# Altium PCB PCB_ATU_V1_IO_Module copy_2023-03-02.pcbdoc (part 2 of 2)
Units mm, origin at the board's own origin, x right, y up, seen from the top; angles counter-clockwise.
Board outline 157.45 x 177.29 mm, 2 copper layers (Top Layer, Bottom Layer); 216 components, 163 nets, 870 pads, 1 vias.
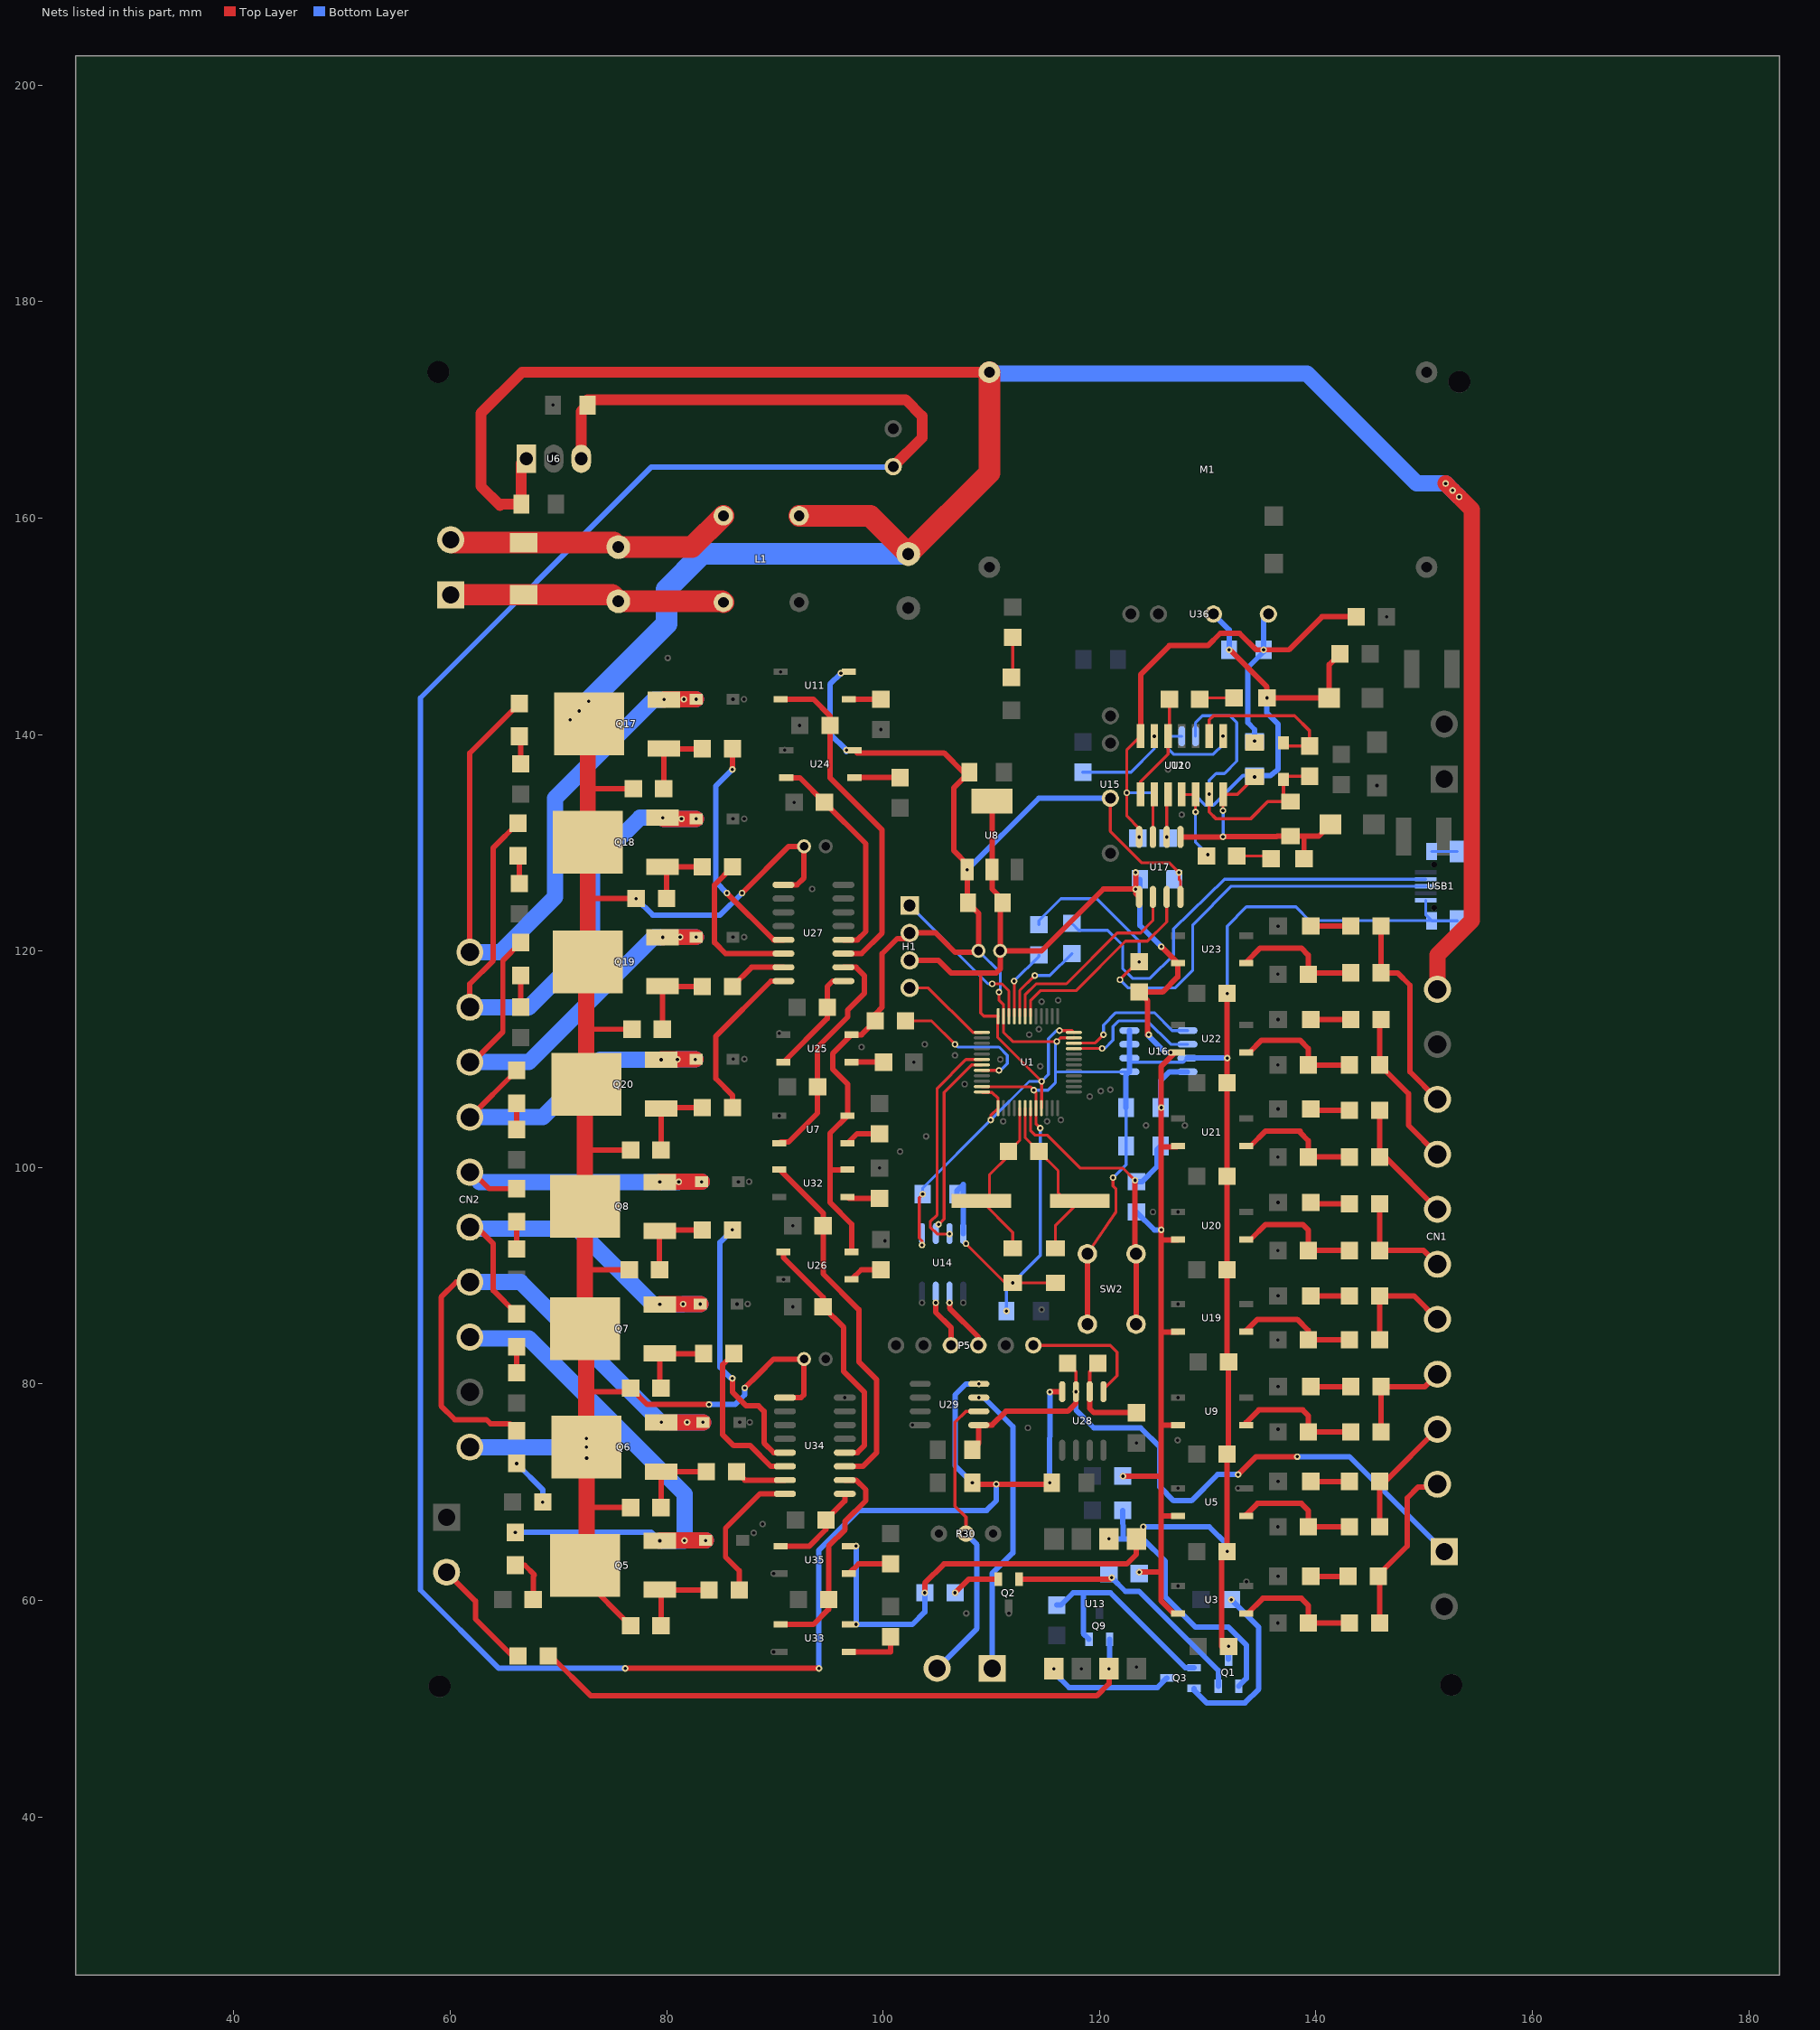
[diagram p2: the nets of this part, all layers, seen from the top]

## Via types
v1: diameter 0.61, hole 0.305, Top Layer to Bottom Layer, tented both sides, 1 vias

## Nets (pads, with @x,y where several pads share a name; then routed paths per layer and width w, separated by ;. In a path a pad name is that pad's centre, name@x,y a point inside that pad or via, vN(x,y) a via of type N, cw(c..) or ccw(c..) an arc to the next point about the centre after c; other vN are vias at no path point) (continued)
GND1: C1.2 C5.1 C6.1 C7.1 C12.2 C16.1 C17.2 C18.1 C22.2 C27.2 H1.2 pad.2@96.105,145.669 pad.2@96.613,138.557 pad.2@97.502,57.785 pad.2@97.502,65.024 pad.2@103.85,60.706 pad.2@107.662,92.964 pad.2@107.775,127.508 pad.2@110.71,116.205 pad.2@111.98,89.339 pad.2@111.404,86.741 pad.2@113.925,107.148 pad.2@114.52,103.632 pad.2@116.044,111.633 pad.2@121.251,99.06 pad.2@124.045,66.802 pad.2@127.347,127.254 pad.2@131.795,64.516 pad.2@131.795,110.109 pad.2@131.795,116.078 pad.2@131.922,55.753 Q1.3 R3.2 R13.1 R15.1 R27.1 R28.1 R29.1 R33.1 R34.1 R35.1 R36.1 SW2.1 SW2.2 U1.8 U1.23 U1.35 U1.47 U7.2 U8.1 U11.2 U13.5 U14.4 U15.4 U16.1 U16.2 U16.3 U16.4 U16.7 U17.4 U24.2 U25.2 U26.2 U32.2 U33.2 U35.2 USB1.5 USB1.8 USB1.9 | length 362.4
  Top Layer w0.27: pad.2@107.662,92.964 111.287,89.339 C5.1@111.98,89.339 C6.1@115.917,89.339 ; U1.47@109.128,107.478 109.163,107.442 113.631,107.442 pad.2@113.925,107.148 114.126,106.947 U1.8@114.127,105.478 ; pad.2@110.71,116.205 110.71,115.443 111.127,115.026 U1.35@111.127,113.978 ; U1.35@111.127,113.978 111.127,112.486 111.98,111.633 pad.2@116.044,111.633 116.389,111.978 U1.23@117.627,111.978 ; U1.8@114.127,105.478 114.139,105.466 114.139,104.013 pad.2@114.52,103.632 ; U1.23@117.627,111.978 U1.23@117.627,112.014 ; SW2.1@118.874,92.024 121.505,95.885 121.505,98.044 121.251,98.298 pad.2@121.251,99.06 ; U15.4@120.997,134.112 121.251,134.112 120.997,133.858 120.997,131.064 123.918,128.143 126.458,128.143 pad.2@127.347,127.254 127.347,126.619 127.474,126.492 U17.4@127.474,124.989
  Top Layer w0.5: 95.089,99.782 96.675,99.782 U32.2@96.715,99.822 U32.2@96.232,99.822 ; U26.2@97.096,92.202 97.096,94.767 95.089,96.774 95.089,98.196 95.089,100.965 95.089,103.149 U7.2@96.715,104.775 96.715,107.721 95.343,109.093 95.343,110.515 U25.2@97.096,112.268 98.008,112.268 R3.2@99.278,113.538 99.278,114.17 99.915,114.808 99.915,119.761 101.312,121.158 101.947,121.158 H1.2@102.455,121.666 104.868,121.666 106.646,119.888 108.694,119.888 C1.2@108.821,120.015 108.821,123.486 C16.1@107.848,124.46 107.775,124.532 U8.1@107.775,127.508 107.775,128.03 106.519,129.286 106.519,135.07 C18.1@107.975,136.525 107.408,136.525 105.63,138.303 97.604,138.303 U24.2@97.35,138.557 ; pad.2@103.85,60.706 103.85,61.592 105.63,63.373 115.79,63.373 122.521,63.373 123.41,64.262 U13.5@123.41,65.69 ; SW2.2@118.874,85.522 SW2.1@118.874,92.024 ; R33.1@131.795,116.078 pad.2@131.795,110.109 R34.1@131.795,107.823 R35.1@131.795,99.187 R36.1@131.795,90.551 131.795,82.169 R29.1@131.922,82.042 131.922,73.66 R28.1@131.795,73.533 R27.1@131.795,64.516 131.284,64.516 131.284,55.753 R15.1@131.922,55.753
  Bottom Layer w0.27: C1.2@108.821,120.015 110.837,117.999 110.837,116.332 pad.2@110.71,116.205 ; pad.2@113.925,107.148 115.242,107.148 115.917,107.823 115.917,111.506 pad.2@116.044,111.633 ; 115.917,108.854 U16.1@122.76,108.839 ; pad.2@121.251,99.06 122.453,100.261 C7.1@122.453,101.981 C12.2@122.453,105.537 ; 122.76,109.731 127.743,109.731 U16.7@128.125,110.109 ; pad.2@131.795,116.078 131.795,122.304 133.57,124.079 138.142,124.079 139.412,122.809 USB1.9@150.702,122.784 ; USB1.5@150.152,124.684 150.152,123.335 USB1.9@150.702,122.784 ; USB1.8@153.056,122.784 USB1.9@150.702,122.784
  Bottom Layer w0.3: C27.2@111.404,86.741 111.404,88.763 pad.2@111.98,89.339 114.52,91.879 pad.2@114.52,103.632
  Bottom Layer w0.5: pad.2@96.105,145.669 95.089,144.653 95.089,140.081 pad.2@96.613,138.557 pad.2@96.613,138.43 ; pad.2@97.502,65.024 pad.2@97.502,57.785 102.709,57.785 103.85,58.925 R13.1@103.85,60.706 ; C22.2@106.842,97.536 106.842,97.859 107.408,98.425 U14.4@107.408,93.891 ; pad.2@107.775,127.508 114.379,134.112 U15.4@120.997,134.112 ; C12.2@122.453,105.537 122.453,108.532 U16.1@122.76,108.839 U16.2@122.76,110.109 U16.3@122.76,111.379 U16.4@122.76,112.649 ; pad.2@124.045,66.802 130.141,66.802 131.795,65.148 pad.2@131.795,64.516 ; U16.7@128.125,110.109 pad.2@131.795,110.109 ; Q1.3@131.919,54.59 131.922,54.592 pad.2@131.922,55.753
GNDRS485: C13.1 C14.1 C15.1 C19.1 D10.2 D11.2 LED2.2 LED3.2 pad.2@131.411,130.556 pad.2@131.411,132.969 pad.2@131.978,147.828 pad.2@134.332,136.075 pad.2@135.468,143.383 R22.2 U10.7 U12.5 U17.5 U36.4 | length 60.5
  Top Layer w0.27: pad.2@131.411,132.969 U10.7@131.411,134.46
  Top Layer w0.3: U10.7@131.411,134.46 132.717,134.46 C15.1@134.332,136.075
  Top Layer w0.5: U17.5@127.474,130.535 131.39,130.534 pad.2@131.411,130.556 136.364,130.556 136.423,130.614 C14.1@137.634,130.614 140.265,130.614 D10.2@141.349,131.699 ; pad.2@131.978,147.828 132.046,147.828 135.468,144.391 LED2.2@135.469,143.383 ; LED2.2@135.469,143.383 D11.2@141.222,143.383 141.222,146.466 R22.2@142.204,147.447 ; LED3.2@138.898,128.524 138.898,130.614
  Bottom Layer w0.3: U12.5@128.871,134.478 128.871,134.366 129.76,133.477 130.522,133.477 133.248,136.202 C13.1@134.332,136.202 ; pad.2@131.411,130.556 pad.2@131.411,132.969
  Bottom Layer w0.5: U36.4@130.522,151.13 131.978,149.675 C19.1@131.978,147.828 ; C13.1@134.332,136.202 135.798,136.202 136.491,136.779 136.491,140.97 135.468,141.994 pad.2@135.468,143.383
INPUT1: CN1.1 R2.2 R58.2 | length 16
  Top Layer w0.5: R2.2@145.892,57.912 145.892,62.103 R58.2@145.765,62.23 145.765,62.36 148.429,65.024 148.429,69.469 149.445,70.485 150.969,70.485 CN1.1@151.223,70.739
INPUT2: CN1.2 R6.2 R59.2 | length 11.5
  Top Layer w0.5: R6.2@145.892,66.802 R59.2@145.892,70.993 146.397,70.993 CN1.2@151.223,75.819
INPUT3: CN1.3 R10.2 R60.2 | length 9.9
  Top Layer w0.5: R10.2@146.019,75.565 R60.2@146.019,79.756 150.08,79.756 CN1.3@151.223,80.899
INPUT4: CN1.4 R12.2 R61.2 | length 10.3
  Top Layer w0.5: R12.2@145.892,84.074 R61.2@145.892,88.138 149.064,88.138 CN1.4@151.223,85.979
INPUT5: CN1.5 R44.2 R62.2 | length 10.2
  Top Layer w0.5: R62.2@145.892,96.647 R44.2@145.892,92.329 149.953,92.329 CN1.5@151.223,91.059
INPUT6: CN1.6 R41.2 R63.2 | length 11.6
  Top Layer w0.5: R63.2@145.892,105.283 R41.2@145.892,100.965 146.397,100.965 CN1.6@151.223,96.139
INPUT7: CN1.7 R39.2 R64.2 | length 14.7
  Top Layer w0.5: R64.2@146.019,113.665 145.892,113.538 R39.2@145.892,109.474 148.556,106.807 148.556,103.886 CN1.7@151.223,101.219
INPUT8: CN1.8 R37.2 R65.2 | length 19
  Top Layer w0.5: R65.2@146.019,122.301 R37.2@146.019,117.983 147.54,117.983 148.683,116.84 148.683,108.839 CN1.8@151.223,106.299
LED1_1: LED1.1 R1.1 | length 3.7
  Top Layer w0.3: LED1.1@111.853,145.281 111.98,145.408 R1.1@111.98,148.968
LED2_1: LED2.1 R16.1 | length 3.2
  Top Layer w0.27: R16.1@129.255,143.256 129.382,143.383 LED2.1@132.434,143.383
LED3_1: LED3.1 R19.1 | length 3.3
  Top Layer w0.27: R19.1@132.684,128.778 135.609,128.778 LED3.1@135.863,128.524
LED_IN1_1: LED_IN1.1 R58.1 | length 3.4
  Top Layer w0.5: LED_IN1.1@139.533,62.23 R58.1@142.966,62.23
LED_OUT1_2: LED_OUT1.2 R84.1 | length 2.4
  Top Layer w0.5: R84.1@66.133,103.508 LED_OUT1.2@66.133,105.925
LED_OUT2_2: LED_OUT2.2 R85.1 | length 2.9
  Top Layer w0.5: R85.1@66.514,114.811 LED_OUT2.2@66.514,117.736
LED_OUT3_2: LED_OUT3.2 R86.1 | length 2.6
  Top Layer w0.5: LED_OUT3.2@66.26,128.785 66.387,128.658 R86.1@66.387,126.241
LED_OUT4_2: LED_OUT4.2 R87.1 | length 2.6
  Top Layer w0.5: LED_OUT4.2@66.387,139.834 66.514,139.707 R87.1@66.514,137.29
LED_OUT5_2: LED_OUT5.2 R91.1 | length 4.5
  Top Layer w0.5: LED_OUT5.2@66.006,63.253 66.889,63.253 67.784,62.357 67.66,62.233 R91.1@67.66,60.071
LED_OUT6_2: LED_OUT6.2 pad.2@66.133,72.651 pad.2@68.549,69.088 R90.1 | length 4.6
  Bottom Layer w0.5: pad.2@66.133,72.651 68.549,70.235 pad.2@68.549,69.088
LED_OUT7_2: LED_OUT7.2 R89.1 | length 2.4
  Top Layer w0.5: R89.1@66.133,81.029 LED_OUT7.2@66.133,83.446
LED_OUT8_2: LED_OUT8.2 R88.1 | length 2.5
  Top Layer w0.5: R88.1@66.133,92.459 LED_OUT8.2@66.133,95.003
NRST: C7.2 pad.2@123.283,98.809 R7.1 SW2.3 SW2.4 U1.7 | length 31.5
  Top Layer w0.27: U1.7@113.627,105.478 113.631,103.378 114.012,102.997 115.155,102.997 118.203,99.949 122.14,99.949 pad.2@123.283,98.809
  Top Layer w0.5: pad.2@123.283,98.809 123.283,92.116 SW2.4@123.375,92.024 SW2.3@123.375,85.522
  Bottom Layer w0.5: R7.1@123.41,98.682 123.921,98.682 125.315,100.076 125.315,101.658 C7.2@125.638,101.981
NULL: 
OUTPUT1T: CN2.4 D20.1 LED_OUT1.1 pad.2@79.496,109.957 pad.2@80.992,109.982 pad.2@82.643,109.982 Q20.3 | length 32.6
  Top Layer w0.5: CN2.4@61.815,104.648 LED_OUT1.1@66.133,108.959
  Top Layer w1.5: Q20.3@79.496,109.956 79.522,109.982 pad.2@80.992,109.982 pad.2@82.643,109.982
  Bottom Layer w1.5: CN2.4@61.815,104.648 68.546,104.648 73.855,109.957 pad.2@79.496,109.957 ; pad.2@79.496,109.957 80.966,109.956 pad.2@80.992,109.982 ; 81.334,109.982 pad.2@80.992,109.982 ; pad.2@82.643,109.982 pad.2@80.992,109.982
OUTPUT2T: CN2.3 D19.1 LED_OUT2.1 pad.2@79.623,121.26 pad.2@81.246,121.285 pad.2@82.721,121.285 Q19.3 | length 41.9
  Top Layer w0.5: CN2.3@61.815,109.728 62.069,109.728 64.863,112.522 64.863,119.118 LED_OUT2.1@66.514,120.77
  Top Layer w1.5: Q19.3@79.623,121.259 79.649,121.285 pad.2@81.246,121.285 D19.1@82.721,121.285
  Bottom Layer w1.5: CN2.3@61.815,109.728 67.276,109.728 78.808,121.26 pad.2@79.623,121.26 ; pad.2@79.623,121.26 79.649,121.285 pad.2@81.246,121.285 pad.2@82.721,121.285
OUTPUT3T: CN2.2 D18.1 LED_OUT3.1 pad.2@79.623,132.309 pad.2@81.373,132.207 pad.2@82.721,132.207 Q18.3 | length 54.4
  Top Layer w0.5: CN2.2@61.815,114.808 61.815,116.967 63.974,119.126 63.974,129.533 LED_OUT3.1@66.26,131.819
  Top Layer w1.5: Q18.3@79.623,132.308 79.724,132.207 pad.2@81.373,132.207 D18.1@82.721,132.207
  Bottom Layer w1.5: CN2.2@61.815,114.808 67.276,114.808 73.118,120.65 73.118,127.889 77.538,132.309 pad.2@79.623,132.309 ; pad.2@79.623,132.309 79.724,132.207 pad.2@81.373,132.207 pad.2@82.721,132.207
OUTPUT4T: CN2.1 D17.1 LED_OUT4.1 pad.2@79.75,143.231 pad.2@81.586,143.256 pad.2@82.721,143.256 Q17.3 | length 63.8
  Top Layer w0.5: CN2.1@61.815,119.888 61.815,138.296 LED_OUT4.1@66.387,142.868
  Top Layer w1.5: Q17.3@79.75,143.23 79.776,143.256 pad.2@81.586,143.256 D17.1@82.721,143.256
  Bottom Layer w1.5: CN2.1@61.815,119.888 64.609,119.888 69.689,124.968 69.689,134.112 78.808,143.231 pad.2@79.75,143.231 ; pad.2@79.776,143.256 81.587,143.256 pad.2@82.721,143.256
OUTPUT5T: CN2.8 D1.1 LED_OUT5.1 pad.2@66.006,66.287 pad.2@79.369,65.506 pad.2@81.647,65.532 pad.2@83.61,65.532 Q5.3 | length 52.3
  Top Layer w1.5: Q5.3@79.369,65.506 79.395,65.532 pad.2@81.647,65.532 D1.1@83.61,65.532
  Bottom Layer w0.5: pad.2@66.006,66.287 78.588,66.287 pad.2@79.369,65.506
  Bottom Layer w1.5: CN2.8@61.815,84.328 61.942,84.201 67.276,84.201 81.647,69.83 pad.2@81.647,65.532 ; pad.2@79.369,65.506 81.621,65.506 pad.2@81.647,65.532 ; pad.2@83.61,65.532 pad.2@81.647,65.532
OUTPUT6T: CN2.7 D2.1 LED_OUT6.1 pad.2@79.522,76.454 pad.2@81.887,76.454 pad.2@83.356,76.454 Q6.3 | length 52
  Top Layer w0.5: CN2.7@61.815,89.408 60.545,89.408 59.148,88.011 59.148,77.978 60.418,76.708 63.339,76.708 63.72,76.327 65.492,76.327 LED_OUT6.1@66.133,75.685
  Top Layer w1.5: Q6.3@79.496,76.428 pad.2@79.522,76.454 pad.2@81.887,76.454 D2.1@83.356,76.454
  Bottom Layer w1.5: CN2.7@61.815,89.408 66.517,89.408 pad.2@79.496,76.429 ; pad.2@79.496,76.428 81.861,76.428 pad.2@81.887,76.454 pad.2@83.356,76.454
OUTPUT7T: CN2.6 D3.1 LED_OUT7.1 pad.2@79.369,87.35 pad.2@81.52,87.376 pad.2@83.102,87.376 Q7.3 | length 38.2
  Top Layer w0.5: CN2.6@61.815,94.488 62.45,94.488 63.974,92.964 63.974,88.639 LED_OUT7.1@66.133,86.48
  Top Layer w1.5: Q7.3@79.369,87.35 79.395,87.376 pad.2@81.52,87.376 D3.1@83.102,87.376
  Bottom Layer w1.5: CN2.6@61.815,94.488 61.942,94.361 71.721,94.361 78.732,87.35 pad.2@79.369,87.35 81.494,87.35 pad.2@81.52,87.376 pad.2@83.102,87.376
OUTPUT8T: CN2.5 D4.1 LED_OUT8.1 pad.2@79.369,98.653 pad.2@81.119,98.679 pad.2@83.229,98.679 Q8.3 | length 32.7
  Top Layer w0.5: CN2.5@61.815,99.568 62.069,99.568 63.593,98.044 LED_OUT8.1@66.133,98.037 ; Q8.3@79.369,98.653 81.093,98.653 pad.2@81.119,98.679
  Top Layer w1.5: Q8.3@79.369,98.653 79.369,98.679 pad.2@81.119,98.679 D4.1@83.229,98.679
  Bottom Layer w1.5: CN2.5@61.815,99.568 62.73,98.653 pad.2@79.369,98.653 81.093,98.653 pad.2@81.119,98.679 ; 81.469,98.679 pad.2@81.119,98.679 ; pad.2@83.229,98.679 pad.2@81.119,98.679
P5_1: P5.1 U28.5 | length 12.2
  Top Layer w0.3: P5.1@113.885,83.566 120.997,83.566 121.632,82.931 121.632,80.772 120.362,79.502 U28.5@120.362,79.286
P5_3: P5.3 pad.2@106.138,87.503 U14.6 | length 5
  Top Layer w0.5: pad.2@106.138,87.503 106.138,86.995 108.805,84.328 P5.3@108.805,83.566
P5_4: P5.4 pad.2@104.868,87.503 U14.7 | length 4.5
  Top Layer w0.5: pad.2@104.868,87.503 104.868,86.614 106.265,85.217 P5.4@106.265,83.566
Q5_1: Q5.1 R57.1 R80.1 | length 7.9
  Top Layer w0.5: R57.1@79.471,57.658 79.471,60.885 Q5.1@79.369,60.986 79.395,60.96 R80.1@83.911,60.96
Q6_1: Q6.1 R77.1 R81.1 | length 7.5
  Top Layer w0.5: R77.1@79.471,68.58 79.471,71.883 Q6.1@79.496,71.908 79.522,71.882 R81.1@83.657,71.882
Q7_1: Q7.1 R78.1 R82.1 | length 7.3
  Top Layer w0.5: R78.1@79.471,79.629 79.369,79.731 Q7.1@79.369,82.83 79.395,82.804 R82.1@83.403,82.804
Q8_1: Q8.1 R79.1 R83.1 | length 7.5
  Top Layer w0.5: R79.1@79.344,90.551 79.344,94.108 Q8.1@79.369,94.133 79.47,94.234 R83.1@83.276,94.234
R2_1: R2.1 R4.2 U3.1 | length 12
  Top Layer w0.5: U3.1@133.545,58.801 133.697,58.801 135.094,60.198 138.65,60.198 139.288,59.56 R4.2@139.288,57.912 R2.1@143.093,57.912
R3_1: pad.2@106.646,111.379 pad.2@110.71,108.966 R3.1 U1.44 | length 14.1
  Top Layer w0.27: R3.1@102.077,113.538 104.487,113.538 pad.2@106.646,111.379 ; U1.44@109.127,108.978 109.139,108.966 pad.2@110.71,108.966
  Bottom Layer w0.27: pad.2@106.646,111.379 106.9,111.125 110.71,111.125 111.472,110.363 111.472,109.601 110.837,108.966 pad.2@110.71,108.966
R5_2: R5.2 R6.1 U5.1 | length 11.9
  Top Layer w0.5: U5.1@133.545,67.818 133.545,67.92 134.586,68.961 138.65,68.961 139.288,68.323 R5.2@139.288,66.802 R6.1@143.093,66.802
R8_1: C6.2 R8.1 U1.6 X1.1 | length 16.7
  Top Layer w0.27: U1.6@113.127,105.478 113.127,102.741 R8.1@114.396,101.473 116.174,99.695 116.171,97.663 116.933,96.901 X1.1@118.184,96.901 ; C6.2@115.917,92.525 115.917,94.634 X1.1@118.184,96.901
R8_2: C5.2 R8.2 U1.5 X1.2 | length 16.1
  Top Layer w0.27: C5.2@111.98,92.525 111.98,93.999 X1.2@109.078,96.901 109.821,96.901 109.821,99.314 111.597,101.089 R8.2@111.597,101.473 112.627,102.503 U1.5@112.627,105.478
R9_2: R9.2 R10.1 U9.1 | length 12.1
  Top Layer w0.5: U9.1@133.545,76.2 133.545,76.429 134.713,77.597 138.777,77.597 139.288,77.086 R9.2@139.288,75.565 R10.1@143.22,75.565
R11_2: R11.2 R12.1 U19.1 | length 11.4
  Top Layer w0.5: U19.1@133.545,84.836 133.545,84.938 134.586,85.979 138.269,85.979 139.288,84.96 R11.2@139.288,84.074 R12.1@143.093,84.074
R13_2: pad.2@106.649,60.706 Q2.1 R13.2 | length 4.5
  Top Layer w0.5: pad.2@106.649,60.706 107.898,61.956 Q2.1@110.649,61.956
R14_1: pad.2@121.124,62.103 Q1.1 Q2.2 R14.1 | length 23.5
  Top Layer w0.5: Q2.2@112.549,61.956 120.977,61.956 pad.2@121.124,62.103
  Bottom Layer w0.5: pad.2@121.124,62.103 122.394,60.833 123.664,60.833 130.969,53.528 Q1.1@130.969,52.09
R16_2: R16.2 U10.1 U10.12 | length 9.9
  Top Layer w0.27: U10.1@123.791,134.46 123.791,135.636 126.331,138.176 U10.12@126.331,139.86 126.456,139.984 R16.2@126.456,143.256
R17_1: pad.2@125.061,139.842 R17.1 U10.13 U12.1 | length 8.7
  Bottom Layer w0.27: R17.1@118.457,136.522 122.905,136.522 125.061,138.679 U12.1@125.061,139.842
R18_1: C14.2 D9.1 pad.2@130.141,134.493 R18.1 U10.6 U12.4 | length 27.6
  Top Layer w0.27: U10.6@130.141,134.46 pad.2@130.141,134.493
  Top Layer w0.3: U10.6@130.141,134.46 130.141,132.842 130.776,132.207 133.951,132.207 135.544,133.8 C14.2@137.634,133.8 ; C14.2@136.999,134.493 D9.1@136.999,135.841 ; D9.1@136.999,135.841 137.3,136.141 R18.1@139.412,136.141
  Bottom Layer w0.27: U12.4@128.871,139.842 128.871,141.097 129.506,141.732 132.046,141.732 132.681,141.097 132.681,137.541 131.538,136.398 130.776,136.398 130.141,135.763 pad.2@130.141,134.493
R18_2: D9.2 R18.2 U10.9 | length 15.4
  Top Layer w0.3: U10.9@130.141,139.86 130.141,141.351 130.522,141.732 138.015,141.732 139.412,140.335 R18.2@139.412,138.941 137.3,138.941 D9.2@136.999,139.241
R19_2: pad.2@128.871,132.842 pad.2@130.012,128.905 R19.2 U10.4 U10.5 | length 7.3
  Top Layer w0.27: U10.4@127.601,134.46 U10.5@128.871,134.46 pad.2@128.871,132.842
  Bottom Layer w0.27: pad.2@128.871,132.842 128.871,130.046 pad.2@130.012,128.905
R37_1: R37.1 R38.2 U23.1 | length 12.4
  Top Layer w0.5: U23.1@133.545,118.872 133.545,118.974 134.84,120.269 138.65,120.269 139.288,119.631 R38.2@139.288,117.856 139.415,117.983 R37.1@143.22,117.983
R39_1: R39.1 R40.2 U22.1 | length 11.9
  Top Layer w0.5: U22.1@133.545,110.617 133.824,110.617 134.967,111.76 138.523,111.76 139.288,110.995 R40.2@139.288,109.474 R39.1@143.093,109.474
R41_1: R41.1 R42.2 U21.1 | length 12.1
  Top Layer w0.5: U21.1@133.545,101.981 133.951,101.981 135.348,103.378 138.523,103.378 138.523,103.251 139.288,102.486 R42.2@139.288,100.965 R41.1@143.093,100.965
R43_2: R43.2 R44.1 U20.1 | length 12.2
  Top Layer w0.5: U20.1@133.545,93.345 133.951,93.345 135.348,94.742 138.777,94.742 139.288,94.231 R43.2@139.288,92.329 R44.1@143.093,92.329
R49_1: R49.1 U26.1 | length 3.1
  Top Layer w0.5: U26.1@97.096,89.662 97.983,90.548 R49.1@99.788,90.548
R50_1: R50.1 U32.1 | length 3
  Top Layer w0.5: U32.1@96.715,97.282 96.845,97.152 R50.1@99.661,97.152
R51_1: R51.1 U33.1 | length 5.2
  Top Layer w0.5: U33.1@96.842,55.245 100.677,55.245 R51.1@100.677,56.639
R55_2: R55.2 U34.1 U35.3 | length 8.8
  Top Layer w0.5: U35.3@90.542,65.024 93.184,65.024 94.711,66.551 R55.2@94.711,67.437 96.461,69.188 U34.1@96.461,69.85
R56_1: R56.1 U35.1 | length 4.2
  Top Layer w0.5: U35.1@96.842,62.484 97.729,63.37 R56.1@100.677,63.37
R59_1: LED_IN2.1 R59.1 | length 3.6
  Top Layer w0.5: LED_IN2.1@139.533,70.993 R59.1@143.093,70.993
R60_1: LED_IN3.1 R60.1 | length 3.7
  Top Layer w0.5: LED_IN3.1@139.533,79.756 R60.1@143.22,79.756
R61_1: LED_IN4.1 R61.1 | length 3.6
  Top Layer w0.5: LED_IN4.1@139.533,88.138 R61.1@143.093,88.138
R62_1: LED_IN5.1 R62.1 | length 3.6
  Top Layer w0.5: LED_IN5.1@139.533,96.774 139.66,96.647 R62.1@143.093,96.647
R63_1: LED_IN6.1 R63.1 | length 3.6
  Top Layer w0.5: LED_IN6.1@139.533,105.41 139.66,105.283 R63.1@143.093,105.283
R64_1: LED_IN7.1 R64.1 | length 3.7
  Top Layer w0.5: LED_IN7.1@139.533,113.665 R64.1@143.22,113.665
R65_1: LED_IN8.1 R65.1 | length 3.7
  Top Layer w0.5: LED_IN8.1@139.533,122.301 R65.1@143.22,122.301
R73_1: Q3.2 Q9.1 R73.1 | length 20.5
  Bottom Layer w0.5: R73.1@116.044,59.566 116.428,59.566 117.568,60.706 120.997,60.706 127.921,53.782 Q3.2@128.724,53.782 ; 118.495,60.706 118.495,56.945 Q9.1@119.031,56.408
R74_2: pad.2@132.176,60.071 Q3.1 R74.2 | length 16.5
  Bottom Layer w0.5: Q3.1@128.724,51.882 128.724,51.709 129.887,50.546 133.443,50.546 134.713,51.816 134.713,57.534 R74.2@132.176,60.071
R94_1: Q17.1 R94.1 R98.1 | length 7.3
  Top Layer w0.5: R98.1@79.725,135.001 79.75,135.026 Q17.1@79.75,138.71 79.776,138.684 R94.1@83.276,138.684
R94_2: pad.2@85.564,125.349 pad.2@86.072,136.779 R94.2 U27.13 | length 21.4
  Top Layer w0.5: pad.2@85.564,125.349 89.882,121.031 U27.13@90.796,121.031 ; pad.2@86.072,136.779 R94.2@86.075,138.684
  Bottom Layer w0.5: pad.2@85.564,125.349 84.548,126.365 84.548,135.255 pad.2@86.072,136.779
R95_1: Q18.1 R95.1 R99.1 | length 6.8
  Top Layer w0.5: R99.1@79.979,124.841 79.979,127.433 Q18.1@79.623,127.788 79.649,127.762 R95.1@83.276,127.762
R95_2: R95.2 U27.14 | length 14.5
  Top Layer w0.5: R95.2@86.075,127.762 84.421,126.109 84.421,120.777 85.437,119.761 87.723,119.761 U27.14@90.796,119.761
R96_1: Q19.1 R96.1 R100.1 | length 7.6
  Top Layer w0.5: R100.1@79.598,112.776 79.623,112.801 Q19.1@79.623,116.739 79.649,116.713 R96.1@83.276,116.713
R96_2: R96.2 U27.15 | length 5.5
  Top Layer w0.5: R96.2@86.075,116.713 87.853,118.491 U27.15@90.796,118.491
R97_1: Q20.1 R97.1 R101.1 | length 7.7
  Top Layer w0.5: R101.1@79.471,101.6 79.496,101.625 Q20.1@79.496,105.436 79.597,105.537 R97.1@83.276,105.537
R97_2: R97.2 U27.16 | length 15.6
  Top Layer w0.5: R97.2@86.075,105.537 86.075,106.677 84.548,108.204 84.548,112.141 89.628,117.221 U27.16@90.796,117.221
RX: U1.31 U17.2 | length 18.8
  Top Layer w0.27: U1.31@113.128,113.977 113.123,115.951 114.139,116.967 115.917,116.967 116.933,116.967 121.632,121.666 123.791,121.666 124.934,122.809 U17.2@124.934,124.989
RX1: U10.2 U17.7 | length 4
  Top Layer w0.27: U17.7@124.934,130.535 124.934,134.333 U10.2@125.061,134.46
S$6: 
S$11: 
S$28: 
S$32: 
S$1126: 
S$113669: 
S$113685: 
S$113701: 
S$113717: 
S$113733: 
S$113749: 
S$113765: 
S$113781: 
S$113800: 
SCL_DAC: pad.2@106.138,93.853 U1.42 U14.3 | length 20.4
  Top Layer w0.27: pad.2@106.138,93.853 104.995,93.853 104.36,94.488 104.36,94.996 104.995,95.631 104.995,107.315 107.657,109.977 U1.42@109.127,109.978
SCL_EEPROM: pad.2@120.235,110.998 U1.21 U16.6 | length 13.2
  Top Layer w0.27: U1.21@117.627,110.978 pad.2@120.235,110.998
  Bottom Layer w0.27: pad.2@120.235,110.998 120.489,110.998 121.251,111.76 121.251,113.03 121.759,113.538 124.426,113.538 126.585,111.379 U16.6@128.125,111.379
SDA_DAC: pad.2@105.122,94.742 U1.43 U14.2 | length 17
  Top Layer w0.27: pad.2@105.122,94.742 105.63,95.25 105.63,95.885 105.63,106.934 108.17,109.474 U1.43@109.128,109.479
SDA_EEPROM: pad.2@120.362,112.268 U1.22 U16.5 | length 12.9
  Top Layer w0.27: U1.22@117.627,111.478 117.627,111.506 119.6,111.506 pad.2@120.362,112.268
  Bottom Layer w0.27: pad.2@120.362,112.268 120.362,113.157 121.505,114.3 125.061,114.3 126.712,112.649 U16.5@128.125,112.649
SWCLK: H1.4 U1.37 | length 8.4
  Top Layer w0.27: H1.4@102.455,116.586 104.19,116.586 108.297,112.479 U1.37@109.128,112.479
SWDIO: H1.1 pad.2@110.075,116.967 U1.34 | length 14.8
  Top Layer w0.27: pad.2@110.075,116.967 110.964,116.967 111.627,116.304 U1.34@111.627,113.978
  Bottom Layer w0.27: H1.1@102.455,124.206 109.694,116.967 pad.2@110.075,116.967
TX: U1.30 U17.3 | length 19.3
  Top Layer w0.27: U1.30@113.627,113.978 113.631,115.443 114.52,116.332 116.552,116.332 117.822,116.332 122.394,120.904 124.426,120.904 126.204,122.682 U17.3@126.204,124.989
TX1: pad.2@126.204,130.534 R20.1 U10.3 U17.6 | length 4
  Top Layer w0.27: U17.6@126.204,130.535 126.204,134.333 U10.3@126.331,134.46
U4_1: C29.2 D5.1 L1.1 U4.1 | length 25.5
  Top Layer w2: U4.1@60.037,152.908 D5.1@66.768,152.921 74.923,152.921 C29.2@75.531,152.313 85.136,152.313 L1.1@85.239,152.209
U4_2: C29.1 D5.2 L1.4 U4.2 | length 26.7
  Top Layer w2: U4.2@60.037,157.988 60.304,157.721 D5.2@66.768,157.721 75.123,157.721 C29.1@75.531,157.313 82.341,157.313 L1.4@85.239,160.21
U7_1: R46.1 U7.1 | length 3.3
  Top Layer w0.5: U7.1@96.715,102.235 97.602,103.121 R46.1@99.661,103.121
U11_1: R47.1 U11.1 | length 2.9
  Top Layer w0.5: U11.1@96.842,143.256 96.845,143.259 R47.1@99.788,143.259
U12_2: pad.2@131.411,139.86 U10.8 U12.2 U12.3 | length 8.9
  Bottom Layer w0.27: U12.3@127.601,139.842 U12.2@126.331,139.842 126.331,138.684 126.839,138.176 130.522,138.176 131.411,139.065 pad.2@131.411,139.86
U13_1: pad.2@115.79,53.69 Q3.3 U13.1 | length 11.7
  Bottom Layer w0.5: pad.2@115.79,53.69 115.79,53.34 117.187,51.943 125.335,51.943 Q3.3@126.224,52.832
U13_3: pad.2@120.87,53.69 Q9.2 R72.1 U13.3 | length 57.9
  Top Layer w0.5: R72.1@69.057,54.864 69.308,54.864 72.991,51.181 119.727,51.181 120.87,52.324 U13.3@120.87,53.69
  Bottom Layer w0.5: pad.2@120.87,53.69 120.931,53.751 Q9.2@120.931,56.408
U13_6: pad.2@120.87,65.69 Q1.2 R76.2 U13.6 | length 25.4
  Bottom Layer w0.5: pad.2@120.87,65.69 124.014,65.69 126.077,63.627 126.077,60.325 128.871,57.531 131.919,57.531 133.57,55.88 133.57,52.791 Q1.2@132.869,52.09 ; R76.2@122.143,68.326 122.168,65.689
U18_2: R72.2 U18.2 | length 10.8
  Top Layer w0.5: U18.2@59.656,62.611 62.323,59.944 62.323,58.293 65.752,54.864 R72.2@66.258,54.864
U24_1: R48.1 U24.1 | length 4.2
  Top Layer w0.5: U24.1@97.35,136.017 97.353,136.02 R48.1@101.566,136.02
U25_1: R110.1 U25.1 | length 2.9
  Top Layer w0.5: U25.1@97.096,109.728 R110.1@100.04,109.728
U25_4: R24.2 U25.4 U27.1 | length 10.4
  Top Layer w0.5: U25.4@90.796,109.728 94.838,113.769 R24.2@94.838,114.808 94.838,116.716 95.343,117.221 U27.1@96.334,117.221
U26_3: R52.1 U26.3 U34.4 | length 23.1
  Top Layer w0.5: U26.3@90.796,92.202 90.796,91.669 94.457,88.009 R52.1@94.457,87.122 96.359,85.22 96.359,81.153 98.264,79.248 98.264,74.295 97.629,73.66 U34.4@96.461,73.66
U27_2: R25.1 U7.4 U27.2 | length 21.4
  Top Layer w0.5: U7.4@90.415,102.235 90.542,102.362 91.279,102.362 93.949,105.032 R25.1@93.949,107.442 93.949,111.128 96.74,113.919 96.74,114.554 98.264,116.078 98.264,117.729 97.502,118.491 U27.2@96.334,118.491
U27_3: R26.1 U11.4 U27.3 | length 31.6
  Top Layer w0.5: U11.4@90.542,143.256 93.565,143.256 95.092,141.729 R26.1@95.092,140.843 95.089,136.017 99.915,131.191 99.915,121.666 98.01,119.761 U27.3@96.334,119.761
U27_4: R45.1 U24.4 U27.4 | length 20.4
  Top Layer w0.5: U24.4@91.05,136.017 92.298,136.017 R45.1@94.584,133.731 98.391,129.924 98.391,121.793 97.629,121.031 U27.4@96.334,121.031
U28_6: R31.1 R32.1 U28.6 | length 9
  Top Layer w0.3: U28.6@119.092,79.286 119.092,81.151 R32.1@119.857,81.915
  Top Layer w0.5: U28.6@119.092,79.286 119.092,77.724 119.471,77.346 R31.1@123.41,77.346
U28_7: C20.1 pad.2@117.822,79.286 pad.2@132.808,71.628 pad.2@138.269,73.279 R32.2 U28.7 U29.5 U31.1 | length 63
  Top Layer w0.3: R32.2@117.058,81.915 117.822,81.151 U28.7@117.822,79.286
  Top Layer w0.5: C20.1@108.239,73.914 108.843,74.519 U29.5@108.843,76.2 110.075,76.2 111.345,77.47 117.06,77.47 117.822,78.232 U28.7@117.822,79.286 ; pad.2@132.808,71.628 134.459,73.279 pad.2@138.269,73.279
  Bottom Layer w0.5: pad.2@117.822,79.286 117.822,77.597 119.473,75.946 123.791,75.946 125.569,74.168 125.569,70.485 126.839,69.215 128.49,69.215 130.903,71.628 pad.2@132.808,71.628 ; pad.2@138.269,73.279 143.095,73.279 U31.1@151.858,64.516
U29_6: R30.2 U29.6 U30.2 | length 27.7
  Top Layer w0.3: R30.2@107.662,66.167 107.662,67.691 106.646,68.707 106.646,76.454 107.662,77.47 U29.6@108.843,77.47
  Bottom Layer w0.5: U30.2@104.995,53.721 108.678,57.404 108.678,65.151 R30.2@107.662,66.167
U29_7: pad.2@108.843,78.74 U29.7 U30.1 | length 27.4
  Bottom Layer w0.5: pad.2@108.843,78.74 109.313,78.74 111.98,76.073 111.98,64.389 110.075,62.484 U30.1@110.075,53.721
U32_3: R53.1 U32.3 U34.3 | length 34
  Top Layer w0.5: U32.3@90.415,99.822 94.457,95.78 R53.1@94.457,94.615 ; R53.1@94.454,95.25 94.454,90.17 97.756,86.868 97.756,82.042 99.407,80.391 99.407,73.66 98.137,72.39 U34.3@96.461,72.39
U33_3: R54.1 U33.3 U34.2 | length 19.8
  Top Layer w0.5: U33.3@90.542,57.785 93.565,57.785 94.965,59.185 R54.1@94.965,60.071 94.965,65.027 96.486,66.548 96.486,67.31 98.391,69.215 98.391,70.231 97.502,71.12 U34.2@96.461,71.12
U34_13: pad.2@86.072,80.518 pad.2@86.075,94.234 R83.2 U34.13 | length 24.9
  Top Layer w0.5: pad.2@86.072,80.518 86.072,79.629 86.072,79.248 87.342,77.978 88.485,77.978 88.993,77.47 88.993,76.708 88.993,74.549 89.882,73.66 U34.13@90.923,73.66
  Bottom Layer w0.5: pad.2@86.072,80.518 85.945,80.518 84.929,81.534 84.929,93.088 pad.2@86.075,94.234
U34_14: R82.2 U34.14 | length 14.9
  Top Layer w0.5: R82.2@86.202,82.804 85.183,81.785 85.183,78.994 85.183,75.311 86.199,74.295 87.723,74.295 89.628,72.39 U34.14@90.923,72.39
U34_15: R81.2 U34.15 | length 4.8
  Top Layer w0.5: R81.2@86.456,71.882 87.218,71.12 U34.15@90.923,71.12
U34_16: R80.2 U34.16 | length 13
  Top Layer w0.5: R80.2@86.71,60.96 86.71,62.735 85.437,64.008 85.437,66.675 88.612,69.85 U34.16@90.923,69.85
USB1_2: R66.2 USB1.2 | length 41.3
  Bottom Layer w0.27: R66.2@117.441,122.558 118.079,121.92 120.743,121.92 122.14,120.523 122.14,118.364 123.029,117.475 124.68,117.475 126.839,119.634 126.839,122.047 131.553,126.634 USB1.2@150.152,126.634
USB1_3: pad.2@121.886,117.348 pad.2@123.664,119.002 R67.2 R68.2 USB1.3 | length 51.4
  Top Layer w0.27: pad.2@121.886,117.348 123.54,119.002 R68.2@123.664,119.002
  Bottom Layer w0.27: R67.2@114.393,122.431 114.393,122.809 116.425,124.841 119.727,124.841 123.664,120.904 pad.2@123.664,119.002 ; pad.2@121.886,117.348 122.648,116.586 126.966,116.586 128.617,118.237 128.617,122.428 128.744,122.555 132.173,125.984 USB1.3@150.152,125.984
USB1_6: USB1.6 USB1.7 | length 2.4
  Bottom Layer w0.27: USB1.6@150.702,129.184 USB1.7@153.056,129.184
USB_DM: pad.2@114.012,117.729 R66.1 U1.32 | length 8.6
  Top Layer w0.27: U1.32@112.627,113.978 112.627,116.344 pad.2@114.012,117.729
  Bottom Layer w0.27: pad.2@114.012,117.729 115.412,117.729 R66.1@117.441,119.758
USB_DP: pad.2@112.107,117.221 R67.1 U1.33 | length 6.6
  Top Layer w0.27: pad.2@112.107,117.221 112.127,117.201 U1.33@112.127,113.978
  Bottom Layer w0.27: pad.2@112.107,117.221 114.393,119.507 R67.1@114.393,119.631
VCC12: C10.2 C28.1 C30.1 C31.1 CN1.10 CN2.10 L1.3 M1.1 pad.2@71.086,141.351 pad.2@71.912,142.177 pad.2@72.61,73.152 pad.2@72.582,74.168 pad.2@72.582,74.973 pad.2@72.801,143.065 pad.2@77.18,124.841 pad.2@83.913,78.105 pad.2@86.961,125.349 pad.2@87.215,79.629 pad.2@151.985,163.195 pad.2@152.63,162.55 pad.2@153.228,161.952 Q5.2 Q6.2 Q7.2 Q8.2 Q17.2 Q18.2 Q19.2 Q20.2 R57.2 R77.2 R78.2 R79.2 R98.2 R99.2 R100.2 R101.2 U6.1 U27.9 U34.9 | length 407
  Top Layer w0.5: Q5.2@72.455,63.246 72.455,61.874 R57.2@76.672,57.658 ; 72.455,68.611 76.641,68.611 R77.2@76.672,68.58 ; 72.455,90.556 R79.2@76.545,90.551 ; 72.455,101.6 R101.2@76.672,101.6 ; 72.582,79.295 76.338,79.295 R78.2@76.672,79.629 78.196,78.105 80.738,78.105 pad.2@83.913,78.105 ; 72.582,112.756 R100.2@76.799,112.776 ; 72.709,124.203 73.347,124.841 R99.2@77.18,124.841 ; 72.709,135.006 R98.2@76.926,135.001 ; pad.2@86.961,125.349 91.279,129.667 C31.1@92.692,129.667 92.692,126.762 92.041,126.111 U27.9@90.796,126.111 ; pad.2@87.215,79.629 88.485,80.899 89.882,82.296 C30.1@92.692,82.296 92.692,79.01 92.422,78.74 U34.9@90.923,78.74
  Top Layer w1: U6.1@67.022,165.486 66.573,165.037 C10.2@66.573,161.29 64.736,161.29 64.609,161.163 62.831,162.941 62.831,169.672 66.623,173.464 M1.1@109.814,173.464
  Top Layer w1.5: Q5.2@72.455,63.246 72.61,63.246 pad.2@72.61,73.152 72.61,74.14 Q6.2@72.582,74.168 pad.2@72.582,74.973 72.582,84.963 Q7.2@72.455,85.09 Q8.2@72.455,96.393 72.455,107.569 Q20.2@72.582,107.696 72.582,118.872 Q19.2@72.709,118.999 Q18.2@72.709,130.048 72.709,140.843 Q17.2@72.836,140.97 ; CN1.10@151.223,116.459 151.223,119.634 154.398,122.809 154.398,160.782 pad.2@153.228,161.952 pad.2@152.63,162.55 pad.2@151.985,163.195
  Top Layer w2: L1.3@92.239,160.21 98.796,160.21 C28.1@102.328,156.678 109.814,164.163 M1.1@109.814,173.464
  Bottom Layer w0.5: pad.2@77.18,124.841 78.704,123.317 84.929,123.317 pad.2@86.961,125.349 ; pad.2@83.913,78.105 86.326,78.105 87.215,78.994 pad.2@87.215,79.629
  Bottom Layer w1.5: CN2.10@61.815,74.168 pad.2@72.582,74.168 pad.2@72.582,74.973 ; M1.1@109.814,173.464 109.923,173.355 139.158,173.355 149.318,163.195 pad.2@151.985,163.195 pad.2@152.63,162.55 pad.2@153.228,161.952
  Bottom Layer w2: pad.2@71.086,141.351 79.976,150.241 79.976,153.416 83.238,156.678 C28.1@102.328,156.678
VCCRS485: C13.2 C15.2 C19.2 pad.2@122.521,134.62 pad.2@123.664,130.534 pad.2@134.332,139.388 pad.2@135.163,147.828 R20.2 R21.1 U10.14 U12.8 U17.8 U36.6 | length 54.8
  Top Layer w0.27: U17.8@123.664,130.535 123.664,131.318 122.521,132.461 122.521,134.366 pad.2@122.521,134.62 122.521,138.59 U10.14@123.791,139.86
  Top Layer w0.5: U10.14@123.791,139.86 123.791,145.542 126.458,148.209 130.014,148.209 131.157,149.352 132.935,149.352 134.459,147.828 pad.2@135.163,147.828 137.507,147.828 140.555,150.876 R21.1@143.728,150.876
  Bottom Layer w0.27: pad.2@122.521,134.62 124.919,134.62 U12.8@125.061,134.478
  Bottom Layer w0.5: C13.2@134.332,139.388 134.332,140.462 133.697,141.097 133.697,146.177 135.163,147.643 C19.2@135.163,147.828 135.163,150.691 U36.6@135.602,151.13
VDD1: C1.1 C12.1 C16.2 C17.1 C22.1 H1.3 pad.2@103.598,92.837 pad.2@103.657,97.536 pad.2@109.948,104.394 pad.2@114.647,107.95 pad.2@116.298,112.649 pad.2@122.172,71.472 pad.2@123.342,125.704 pad.2@123.342,127.254 pad.2@123.664,62.611 pad.2@124.553,112.268 pad.2@125.696,94.234 pad.2@125.696,105.537 pad.2@125.696,120.396 pad.2@126.585,110.617 R7.2 R14.2 R68.1 R75.2 U1.1 U1.9 U1.24 U1.36 U1.48 U3.4 U5.4 U8.2 U8.4 U9.4 U14.1 U16.8 U17.1 U19.4 U20.4 U21.4 U22.4 U23.4 | length 188.1
  Top Layer w0.27: pad.2@103.598,92.837 103.598,93.218 103.344,93.472 103.344,97.224 pad.2@103.657,97.536 ; 109.026,117.983 109.026,114.264 109.313,113.977 U1.36@110.627,113.978 110.583,113.934 110.583,112.014 pad.2@114.647,107.95 114.647,105.498 U1.9@114.627,105.478 ; U1.48@109.127,106.978 109.171,106.934 110.075,106.934 110.627,106.382 U1.1@110.627,105.478 109.948,104.799 pad.2@109.948,104.394 ; 109.313,117.983 110.456,117.983 ; pad.2@116.298,112.649 117.456,112.649 U1.24@117.627,112.478
  Top Layer w0.5: H1.3@102.455,119.126 105.122,119.126 106.265,117.983 110.456,117.983 110.837,118.364 C1.1@110.821,120.015 ; U8.4@110.075,133.858 U8.2@110.075,127.508 110.075,125.73 111.033,124.772 C16.2@111.033,124.46 110.821,124.248 C1.1@110.821,120.015 ; pad.2@122.143,71.501 pad.2@122.172,71.472 125.696,71.472 ; pad.2@123.342,127.254 pad.2@123.342,125.704 ; pad.2@123.664,62.611 125.562,62.611 125.696,62.745 ; U17.1@123.664,124.989 123.342,125.312 pad.2@123.342,125.704 ; pad.2@124.426,112.268 124.426,115.44 R68.1@123.664,116.202 125.821,116.202 127.22,117.602 U23.4@127.245,118.872 pad.2@125.696,120.396 ; 125.696,67.813 U5.4@127.245,67.818 ; 125.696,76.195 U9.4@127.245,76.2 ; 125.696,84.804 127.213,84.804 U19.4@127.245,84.836 ; 125.696,93.317 127.217,93.317 U20.4@127.245,93.345 ; 125.696,101.887 127.151,101.887 U21.4@127.245,101.981 ; 125.696,108.785 125.696,109.347 ; U3.4@127.245,58.801 126.839,58.801 125.696,59.944 pad.2@125.696,105.537 125.696,109.347 ; U22.4@127.245,110.617 126.966,110.617 125.696,109.347 ; C1.1@110.821,120.015 114.647,120.015 120.362,125.73 123.316,125.73 pad.2@123.342,125.704
  Bottom Layer w0.27: C22.1@103.657,97.536 103.657,98.102 pad.2@109.948,104.394 113.504,107.95 pad.2@114.647,107.95 115.282,108.585 115.282,111.887 116.044,112.649 pad.2@116.298,112.649
  Bottom Layer w0.5: R7.2@123.41,95.882 125.059,94.234 pad.2@125.696,94.234 ; C17.1@123.723,126.619 123.723,122.37 pad.2@125.696,120.396 ; pad.2@124.426,112.268 126.077,110.617 pad.2@126.585,110.617 ; C12.1@125.638,105.537 125.638,108.019 126.458,108.839 U16.8@128.125,108.839
VOP: C2.2 C11.1 C23.1 C24.2 pad.2@108.239,70.866 pad.2@108.843,80.01 pad.2@110.456,70.739 pad.2@115.395,70.866 pad.2@115.409,79.248 pad.4 pad.5 U6.3 U28.8 U29.8 | length 277
  Top Layer w0.3: pad.2@115.395,70.866 C23.1@115.595,70.866
  Top Layer w0.5: pad.5@76.166,53.721 pad.4@94.073,53.721 ; C24.2@108.239,70.866 108.366,70.739 pad.2@110.456,70.739 115.268,70.739 pad.2@115.395,70.866 ; pad.2@115.409,79.248 115.447,79.286 U28.8@116.552,79.286
  Top Layer w1: U6.3@72.102,165.476 72.102,169.858 C2.2@72.679,170.434 72.679,170.942 102.074,170.942 103.598,169.418 103.598,167.414 C11.1@100.931,164.747
  Bottom Layer w0.5: pad.5@76.166,53.721 64.482,53.721 57.243,60.96 57.243,143.383 78.579,164.719 100.903,164.719 C11.1@100.931,164.747 ; pad.4@94.073,53.721 94.073,56.388 94.073,64.643 97.756,68.326 109.567,68.326 110.456,69.215 pad.2@110.456,70.739 ; pad.2@108.239,70.866 106.646,72.459 106.646,78.994 107.662,80.01 pad.2@108.843,80.01 ; pad.2@115.395,70.866 pad.2@115.409,79.248
pads on no net: R30.1 U1.3 U1.4 U1.29 U1.38 U1.39 U1.40 U1.41 U10.10 U10.11 U13.7 U13.8 U27.5 U27.6 U27.7 U27.10 U27.11 U27.12 U28.1 U28.2 U28.3 U29.1 U29.2 U29.3 U34.5 U34.6 U34.7 U34.10 U34.11 U34.12 USB1. USB1.4

## Polygon pours and split planes (outlines as drawn)
GND on Bottom Layer (solid): 48.607,183.642 160.367,183.642 162.018,181.991 162.018,50.546 157.319,45.847 53.687,45.847 49.623,49.911
GND on Top Layer (solid): 43.908,189.103 161.383,189.103 170.146,180.34 170.146,47.879 160.367,38.1 51.147,38.1 44.289,44.958

## Keep-outs
Keep-Out Layer:
  lines w0.254 net S$113800: 56.078,174.35 cw(c57.946,173.995) 58.237,175.874 ; 56.1,51.562 ccw(c57.979,51.271) 57.624,49.403 ; 153.382,49.403 ccw(c153.673,51.282) 155.541,50.927 ; 154.017,175.768 cw(c153.662,173.9) 155.541,173.609

## Silkscreen, mask and mechanical layers (free items; w line width, h text height)
Bottom Overlay:
  text "Version:1.0" at 84.421,57.912 h2.03
  text "Made in China" at 85.818,54.61 h2.03
  text "Design in Viet Nam" at 89.882,51.308 h2.03
Top Solder:
  circle w1.5 net S$113733: c152.493,52.197 r1.136
  circle w1.5 net S$113749: c59.021,52.07 r1.092
  circle w1.5 net S$113765: c58.894,173.609 r1.024
  circle w1.5 net S$113781: c153.255,172.593 r1.047
  region: 71.848,66.04 73.372,66.04 73.372,138.303 71.975,138.303
Bottom Solder:
  circle w1.5 net S$113669: c153.255,172.466 r1.024
  circle w1.5 net S$113685: c58.894,173.482 r1.085
  circle w1.5 net S$113701: c59.021,52.07 r1.171
  circle w1.5 net S$113717: c152.493,52.197 r1.024

## Text inside footprints (layer, text, board x,y; h text height)
M1: Top Overlay "LM2596 DC-DC" at 117.695,161.798 h2.03; Top Overlay "IN+" at 112.234,171.069 h2.03; Top Overlay "IN-" at 112.234,155.829 h2.03; Top Overlay "OUT-" at 140.174,155.829 h2.03; Top Overlay "OUT+" at 140.174,171.069 h2.03
P5: Top Overlay "OUT" at 113.347,82.55 h1 r270; Top Overlay "GND" at 110.807,82.55 h1 r270; Top Overlay "SCL" at 108.297,81.161 h1; Top Overlay "SCA" at 105.376,81.161 h1; Top Overlay "VCC" at 102.455,81.161 h1; Top Overlay "GND" at 100.304,82.423 h1 r270